# Altium PCB Amber_Main_Board.PcbDoc (part 6 of 6)
Units mm, origin at the board's own origin, x right, y up, seen from the top; angles counter-clockwise.
Board outline 90 x 23 mm, 4 copper layers (Top Layer, Power, Ground, Bottom Layer), stack 1.142 mm thick; 237 components, 104 nets, 614 pads, 347 vias.
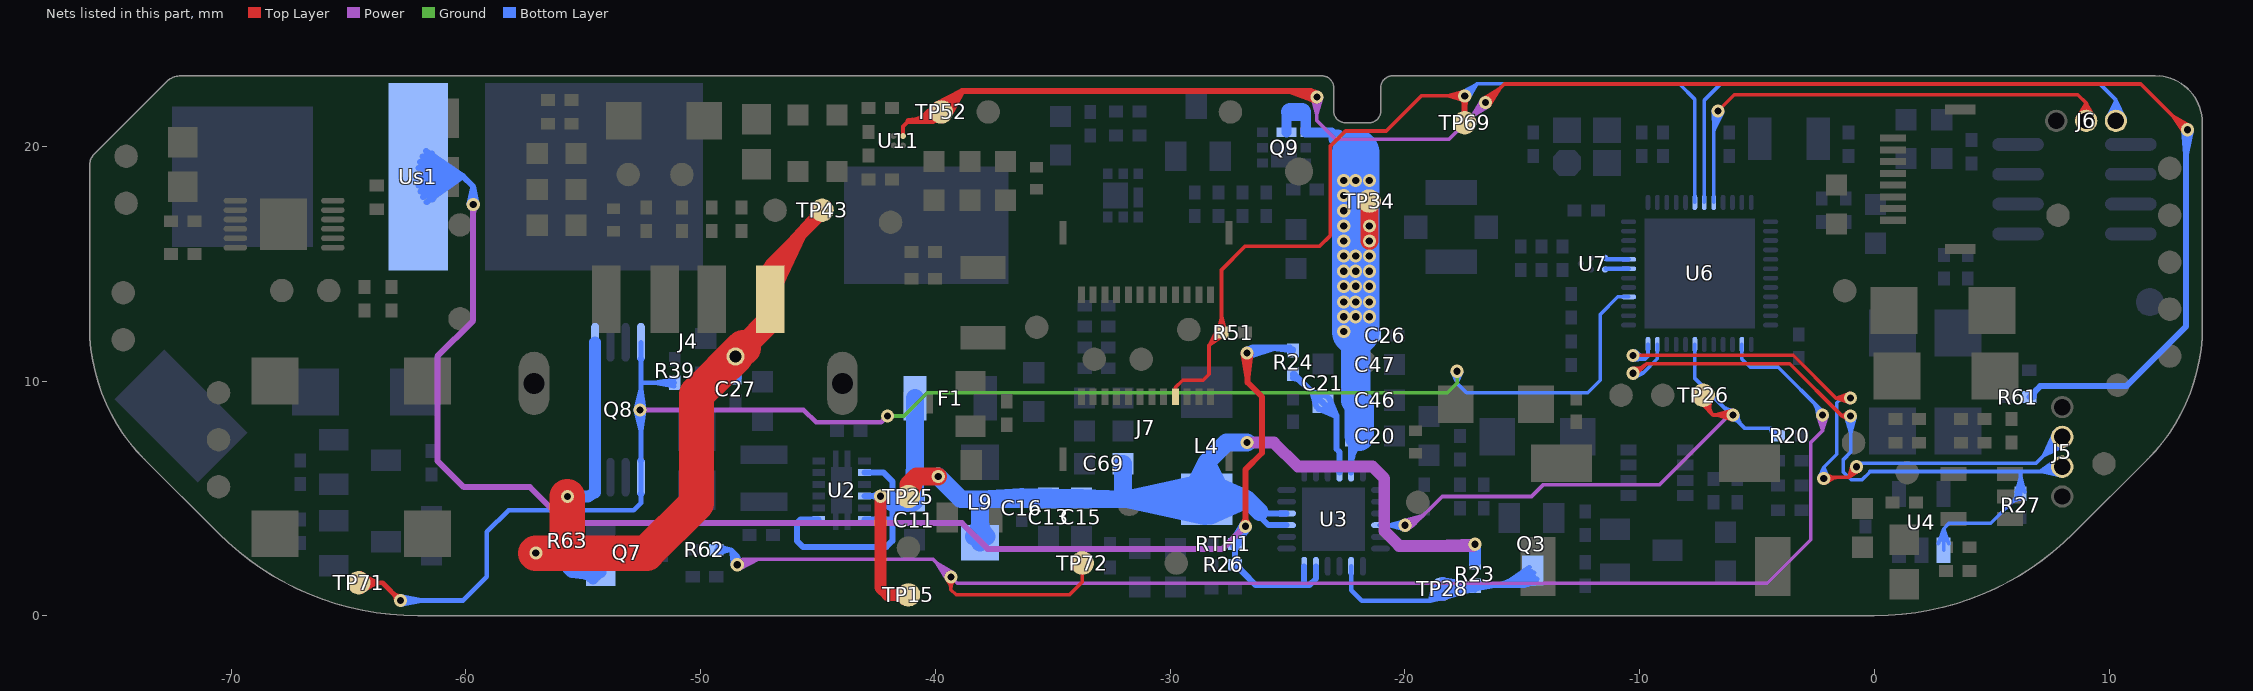
[diagram p8: the nets of this part, all layers, seen from the top]

## Via types
v1: diameter 0.559, hole 0.305, Top Layer to Bottom Layer, tented both sides, 306 vias
v2: diameter 0.66, hole 0.33, Top Layer to Bottom Layer, tented both sides, 16 vias
v3: diameter 0.762, hole 0.508, Top Layer to Bottom Layer, tented both sides, 12 vias
v4: diameter 0.6, hole 0.3, Top Layer to Bottom Layer, tented both sides, 9 vias
v5: diameter 0.5, hole 0.3, Top Layer to Bottom Layer, 3 vias
v6: diameter 0.762, hole 0.559, Top Layer to Bottom Layer, tented both sides, 1 vias

## Nets (pads, with @x,y where several pads share a name; then routed paths per layer and width w, separated by ;. In a path a pad name is that pad's centre, name@x,y a point inside that pad or via, vN(x,y) a via of type N, cw(c..) or ccw(c..) an arc to the next point about the centre after c; other vN are vias at no path point) (continued)
NetR61_1: R61.1 TP52.1 U11.B2 | length 113.2
  Top Layer w0.152: v1@-16.69,22.017 -15.961,22.459 v1@-16.404,21.731 ; v1(-16.564,21.857) -15.77,22.651 11.344,22.651 13.294,20.701 v1(13.335,20.701) ; v1@-16.564,22.06 ccw(c-16.564,22.55) -16.217,22.204 ccw(c-15.87,21.857) v1@-16.361,21.857 ; 12.918,21.077 ccw(c13.335,21.495) v1@13.335,20.904 ; 13.017,20.977 cw(c12.741,20.701) v1@13.132,20.701 ; v1@13.162,20.594 13.04,20.983 ; v1@13.18,20.57 12.714,21.281 ; v1@13.434,20.878 13.04,20.983 ; v1@13.455,20.865 12.714,21.281 ; 12.714,21.281 v1(13.335,20.701) ; 13.04,20.983 v1(13.335,20.701)
  Top Layer w0.178: U11.B2@-41.383,20.438 -41.383,20.847 -41.154,21.076
  Top Layer w0.254: -40.685,21.076 ccw(c-40.685,22.072) TP52.1@-39.851,21.528 ; -40.216,21.076 ccw(c-40.216,21.766) TP52.1@-39.638,21.389 ; TP52.1@-40.093,21.314 cw(c-40.29,21.228) -40.138,21.076 ; TP52.1@-40.063,21.667 cw(c-41.154,22.378) -41.154,21.076 -40.138,21.076 ; TP52.1@-39.973,21.763 -38.862,22.352 ; TP52.1@-39.935,21.788 -40.565,21.217 ; TP52.1@-39.9,21.121 ccw(c-39.986,20.924) -40.138,21.076 ; TP52.1@-39.751,21.836 ccw(c-39.751,22.736) -39.114,22.1 ccw(c-38.478,21.463) TP52.1@-39.378,21.463 ; TP52.1@-39.724,21.091 -40.565,21.217 ; TP52.1@-39.451,21.241 -38.862,22.352 ; -24.73,22.352 cw(c-24.73,21.117) v1@-23.857,21.99 ; -24.117,22.352 cw(c-24.117,21.73) v1@-23.677,22.17 ; v1@-23.901,22.101 ccw(c-24.248,22.107) -24.003,22.352 ; v1@-23.811,21.959 -24.41,22.31 ; v1@-23.794,22.143 -24.003,22.352 ; v1@-23.792,21.952 -24.885,22.352 ; v1@-23.752,22.25 cw(c-23.758,22.597) -24.003,22.352 ; v1@-23.726,22.249 -24.885,22.352 ; v1@-23.719,22.247 -24.41,22.31 ; -40.565,21.217 TP52.1@-39.751,21.463 ; -40.138,21.076 TP52.1@-39.751,21.463 ; TP52.1@-39.751,21.463 -38.862,22.352 ; -38.862,22.352 -24.003,22.352 ; -24.885,22.352 v1(-23.749,22.098) -24.41,22.31
  Power w0.152: v1@-23.95,22.07 -23.749,21.361 v1@-23.548,22.07 ; v1@-23.947,22.05 -23.766,21.734 ; v1@-23.941,22.032 -23.732,21.734 ; v1@-23.893,21.954 cw(c-24.24,21.607) -23.749,21.607 cw(c-23.258,21.607) v1@-23.605,21.954 ; v1@-23.557,22.032 -23.766,21.734 ; v1@-23.551,22.05 -23.732,21.734 ; v1@-16.767,21.857 cw(c-17.258,21.857) -16.911,21.51 cw(c-16.564,21.163) v1@-16.564,21.654 ; v1@-16.724,21.982 -17.167,21.254 ; v1@-16.439,21.697 -17.167,21.254 ; -23.766,21.734 v1(-23.749,22.098) ; v1(-23.749,22.098) -23.732,21.734 ; v1(-23.749,22.098) -23.749,21.082 -22.974,20.307 -18.113,20.307 v1(-16.564,21.857) -17.167,21.254
  Bottom Layer w0.254: R61.1@6.596,9.316 7.059,9.779 ; R61.1@6.646,9.316 7.059,9.779 ; R61.1@6.769,9.316 cw(c7.187,9.316) 6.891,9.611 ; v1@13.183,20.698 13.281,19.655 ; v1@13.184,20.683 13.3,20.346 ; 13.281,20.203 cw(c13.833,20.203) v1@13.443,20.593 ; v1@13.281,20.714 13.281,12.332 10.728,9.779 7.059,9.779 ; v1@13.48,20.654 13.3,20.346 ; v1@13.486,20.682 13.281,19.655 ; 13.281,19.655 v1(13.335,20.701) 13.3,20.346
NetU6_31: U6.31 U7.1 | length 1
  Bottom Layer w0.203: U7.1@-11.442,14.783 U6.31@-10.472,14.783
NetU6_32: U6.32 U7.2 | length 0.9
  Bottom Layer w0.203: U7.2@-11.41,15.183 U6.32@-10.472,15.183
NTC: R24.2 R26.1 RTH1.1 U3.11 U3.12 Us1.2 | length 148.5
  Top Layer w0.254: v1@-26.905,3.918 ccw(c-27.165,4.178) -26.797,4.178 ccw(c-26.429,4.178) v1@-26.689,3.918 ; v1@-26.876,11.174 -26.699,10.147 ; v1@-26.871,11.147 -26.714,10.877 ; v1@-26.832,11.081 cw(c-27.153,10.759) -26.699,10.759 ; v1(-26.797,3.81) -26.797,6.223 -26.089,6.931 -26.089,9.325 -26.699,9.935 -26.699,11.163 v1(-26.724,11.189) ; -26.699,10.882 cw(c-26.417,10.882) v1@-26.616,11.081 ; v1@-26.575,11.156 -26.714,10.877 ; v1@-26.572,11.181 -26.699,10.147 ; v1(-26.724,11.189) -26.714,10.877 ; v1(-26.724,11.189) -26.699,10.147
  Power w0.254: v1@-59.798,17.418 cw(c-60.058,17.158) -59.69,17.158 cw(c-59.322,17.158) v1@-59.582,17.418 ; v1(-59.69,17.526) -59.69,12.573 -61.214,11.049 -61.214,6.604 -60.09,5.48 -57.271,5.48 -55.74,3.95 -38.875,3.95 -37.778,2.853 -27.754,2.853 v1(-26.797,3.81) ; v1@-26.949,3.81 cw(c-27.317,3.81) -27.057,3.55 cw(c-26.797,3.29) v1@-26.797,3.658
  Bottom Layer w0.254: Us1.2@-62.025,19.081 -60.659,18.872 ; Us1.2@-62.015,18.319 -60.669,18.565 ; Us1.2@-61.997,19.08 -60.128,18.726 ; Us1.2@-61.987,18.321 -60.128,18.726 ; Us1.2@-61.962,19.331 -60.659,18.872 ; Us1.2@-61.944,18.071 -60.669,18.565 ; Us1.2@-61.94,19.07 -60.669,18.565 ; Us1.2@-61.933,19.327 -60.128,18.726 ; Us1.2@-61.931,18.332 -60.659,18.872 ; Us1.2@-61.916,18.075 -60.128,18.726 ; Us1.2@-61.851,19.571 -60.659,18.872 ; Us1.2@-61.834,19.567 -60.128,18.726 ; Us1.2@-61.826,17.835 -60.669,18.565 ; Us1.2@-61.822,19.3 -60.669,18.565 ; Us1.2@-61.811,17.838 -60.128,18.726 ; Us1.2@-61.808,18.105 -60.659,18.872 ; Us1.2@-61.701,19.795 -60.128,18.726 ; Us1.2@-61.691,19.791 -60.659,18.872 ; Us1.2@-61.672,17.615 -60.128,18.726 ; Us1.2@-61.66,19.508 -60.669,18.565 ; Us1.2@-61.658,17.619 -60.669,18.565 ; Us1.2@-61.642,17.9 -60.659,18.872 ; Us1.2@-61.452,19.686 -60.669,18.565 ; Us1.2@-61.431,17.726 -60.659,18.872 ; Us1.2@-61.254,19.133 ccw(c-60.56,19.52) -60.56,18.726 ; Us1.2@-61.237,18.298 cw(c-60.541,17.946) -60.541,18.726 ; Us1.2@-61.032,19.257 ccw(c-60.128,19.761) -60.128,18.726 ; Us1.2@-61.01,18.183 cw(c-60.128,17.736) -60.128,18.726 ; v1@-59.842,17.541 -59.69,18.288 ; v1@-59.798,17.634 ccw(c-60.058,17.894) -59.69,17.894 ccw(c-59.322,17.894) v1@-59.582,17.634 ; v1(-59.69,17.526) -59.69,18.288 ; v1@-59.538,17.541 -59.69,18.288 ; R26.1@-27.327,2.259 ccw(c-27.537,2.469) -27.24,2.469 ccw(c-26.943,2.469) R26.1@-27.153,2.259 ; RTH1.1@-27.327,2.974 cw(c-27.537,2.764) -27.24,2.764 cw(c-26.943,2.764) RTH1.1@-27.153,2.974 ; RTH1.1@-27.327,3.148 ccw(c-27.537,3.358) -27.24,3.358 ccw(c-26.943,3.358) RTH1.1@-27.153,3.148 ; RTH1.1@-27.321,3.05 cw(c-26.85,3.089) -27.184,3.423 ; R26.1@-27.24,2.172 RTH1.1@-27.24,3.061 ; R26.1@-27.19,2.172 -26.446,1.386 ; R26.1@-27.067,2.172 ccw(c-26.669,2.172) -26.95,1.89 ; RTH1.1@-27.067,3.071 cw(c-26.136,3.149) v1(-26.797,3.81) ; -26.982,3.547 RTH1.1@-27.19,3.061 ; v1@-26.949,3.81 cw(c-27.317,3.81) -27.057,3.55 cw(c-26.797,3.29) v1@-26.797,3.658 ; v1@-26.944,3.771 cw(c-27.3,3.675) -26.981,3.491 cw(c-26.662,3.307) v1@-26.758,3.663 ; v1@-26.939,3.864 -27.039,3.391 ; v1@-26.917,3.904 -27.24,3.367 ; v1@-26.796,11.261 cw(c-26.387,10.852) -26.387,11.43 ; v1@-26.753,11.338 -26.082,11.389 ; v1@-26.745,11.34 -25.513,11.43 ; v1@-26.703,3.69 -27.24,3.367 ; v1@-26.685,11.041 -25.513,11.43 ; v1@-26.679,3.714 -27.039,3.391 ; v1@-26.662,11.049 -26.082,11.389 ; v1@-26.616,11.081 cw(c-25.774,10.238) -25.774,11.43 ; -25.825,11.43 R24.2@-24.765,11.295 -24.9,11.43 -26.483,11.43 v1(-26.724,11.189) ; -25.267,11.43 cw(c-25.267,10.843) R24.2@-24.852,11.258 ; -25.115,11.41 R24.2@-24.765,11.345 ; U3.12@-24.291,1.834 -24.291,1.349 ; U3.12@-24.291,2.109 -24.291,1.349 ; U3.11@-23.791,1.834 -23.791,1.581 ; U3.11@-23.791,2.109 -23.791,1.581 ; Us1.2@-62.03,18.7 -60.659,18.872 ; Us1.2@-62.03,18.7 -60.669,18.565 ; Us1.2@-62.03,18.7 -60.128,18.726 ; Us1.2@-62.03,18.7 -62.004,18.726 -60.128,18.726 ; -60.128,18.726 -59.69,18.288 ; RTH1.1@-27.24,3.061 -27.24,3.367 ; RTH1.1@-27.24,3.061 -27.24,3.367 ; RTH1.1@-27.24,3.061 -27.24,2.18 -26.375,1.315 -24.257,1.315 ; -27.24,3.367 v1(-26.797,3.81) ; -27.24,3.367 v1(-26.797,3.81) ; RTH1.1@-27.19,3.061 -26.669,3.727 RTH1.1@-27.19,3.061 ; RTH1.1@-27.19,3.061 v1(-26.797,3.81) ; RTH1.1@-27.19,3.061 -26.938,3.868 RTH1.1@-27.19,3.061 ; RTH1.1@-27.19,3.061 v1(-26.797,3.81) ; RTH1.1@-27.19,3.061 v1(-26.797,3.81) ; -27.039,3.391 v1(-26.797,3.81) ; v1(-26.724,11.189) -26.082,11.389 ; v1(-26.724,11.189) -25.513,11.43 ; -24.291,1.349 -24.257,1.315 ; -24.257,1.315 -24.057,1.315 -23.791,1.581
ON/OFF: Q8.4 Q8.5 R39.1 TP71.1 U6.28 | length 105.9
  Top Layer w0.203: TP71.1@-64.552,1.215 -63.857,1.377 ; TP71.1@-64.552,1.604 -63.857,1.443 ; TP71.1@-64.535,1.218 -63.857,1.443 ; TP71.1@-64.535,1.602 -63.857,1.377 ; TP71.1@-64.477,1.022 -63.857,1.377 ; TP71.1@-64.477,1.797 -63.857,1.443 ; TP71.1@-64.441,1.033 -63.857,1.443 ; TP71.1@-64.441,1.787 -63.857,1.377 ; TP71.1@-64.288,1.128 cw(c-63.608,0.448) -63.608,1.41 cw(c-63.608,2.372) TP71.1@-64.288,1.691 ; v1@-62.97,0.648 ccw(c-63.399,0.648) -63.096,0.951 ccw(c-62.792,1.255) v1@-62.792,0.826 ; v1(-62.792,0.648) -63.554,1.41 TP71.1@-64.57,1.41 ; TP71.1@-64.57,1.41 -63.857,1.377 ; TP71.1@-64.57,1.41 -63.857,1.443
  Power w0.203: v1(-52.578,8.763) -45.606,8.763 -45.085,8.242 -42.304,8.242 v1(-42.037,8.509)
  Ground w0.152: v1(-42.037,8.509) -41.337,8.509 -40.346,9.5 -18.186,9.5 -17.78,9.906 v1(-17.78,10.414)
  Bottom Layer w0.152: v1@-17.979,10.373 -17.78,9.906 ; v1@-17.978,10.366 -17.797,10.05 ; v1@-17.972,10.348 -17.763,10.05 ; v1@-17.924,10.27 cw(c-18.271,9.923) -17.78,9.923 cw(c-17.289,9.923) v1@-17.636,10.27 ; v1@-17.588,10.348 -17.797,10.05 ; v1@-17.582,10.366 -17.763,10.05 ; v1@-17.581,10.373 -17.78,9.906 ; U6.28@-10.697,13.583 -10.936,13.583 ; U6.28@-10.472,13.583 -10.936,13.583 ; -17.797,10.05 v1(-17.78,10.414) ; -17.78,9.906 v1(-17.78,10.414) ; -17.78,9.906 v1(-17.78,10.414) ; -17.78,9.906 -17.374,9.5 -12.212,9.5 -11.684,10.028 -11.684,12.835 -10.936,13.583 ; v1(-17.78,10.414) -17.763,10.05
  Bottom Layer w0.203: v1@-62.774,0.471 -61.903,0.648 v1@-62.774,0.825 ; v1@-62.75,0.475 -62.474,0.633 ; v1@-62.75,0.821 -62.474,0.662 ; v1@-62.735,0.479 -62.474,0.662 ; v1@-62.735,0.816 -62.474,0.633 ; v1@-62.666,0.522 cw(c-62.363,0.218) -62.363,0.648 cw(c-62.363,1.077) v1@-62.666,0.773 ; v1@-52.754,8.739 -52.546,7.873 ; v1@-52.754,8.787 -52.546,9.653 ; v1@-52.749,8.714 -52.564,8.396 ; v1@-52.749,8.812 -52.564,9.13 ; v1@-52.704,8.637 cw(c-53.084,8.257) -52.546,8.257 ; v1@-52.704,8.889 ccw(c-53.084,9.269) -52.546,9.269 ; Q8.5@-52.598,5.199 cw(c-52.723,5.074) -52.546,5.074 cw(c-52.369,5.074) Q8.5@-52.494,5.199 ; Q8.5@-52.598,6.603 ccw(c-52.723,6.728) -52.546,6.728 ccw(c-52.369,6.728) Q8.5@-52.494,6.603 ; Q8.4@-52.598,10.949 cw(c-52.723,10.824) -52.546,10.824 cw(c-52.369,10.824) Q8.4@-52.494,10.949 ; Q8.5@-52.546,5.251 -52.546,4.798 ; Q8.5@-52.546,6.551 -52.546,7.335 ; -52.546,8.411 cw(c-52.226,8.411) v1@-52.452,8.637 ; -52.546,9.115 ccw(c-52.226,9.115) v1@-52.452,8.889 ; -52.546,10.216 Q8.4@-52.546,11.001 ; Q8.4@-52.546,11.651 Q8.5@-52.546,5.901 -52.546,4.798 ; -52.538,9.927 R39.1@-51.108,9.927 ; v1@-52.404,8.726 -52.564,8.396 ; v1@-52.404,8.8 -52.564,9.13 ; v1@-52.401,8.752 -52.546,7.873 ; v1@-52.401,8.774 -52.546,9.653 ; R39.1@-51.213,9.822 ccw(c-51.466,9.568) -51.466,9.927 ccw(c-51.466,10.285) R39.1@-51.213,10.032 ; R39.1@-51.156,9.786 -51.374,9.939 ; R39.1@-51.156,10.067 -51.374,9.915 ; R39.1@-51.143,9.782 -51.374,9.915 ; R39.1@-51.143,10.071 -51.374,9.939 ; R39.1@-51.121,9.779 -51.968,9.927 ; R39.1@-51.121,10.075 -51.968,9.927 ; v1(-62.792,0.648) -62.474,0.633 ; v1(-62.792,0.648) -62.474,0.662 ; v1(-62.792,0.648) -60.125,0.648 -59.109,1.664 -59.109,3.569 -58.182,4.496 -52.848,4.496 -52.546,4.798 ; v1(-52.578,8.763) -52.564,9.13 ; v1(-52.578,8.763) -52.564,8.396 ; v1(-52.578,8.763) -52.546,9.653 ; v1(-52.578,8.763) -52.546,7.873 ; -51.968,9.927 R39.1@-51.108,9.927 ; -51.374,9.915 R39.1@-51.108,9.927 ; -51.374,9.939 R39.1@-51.108,9.927
OTG: Q3.3 R23.1 TP28.1 U3.8 | length 137.8
  Bottom Layer w0.203: -22.291,1.099 U3.8@-22.291,1.834 ; U3.8@-22.291,2.109 -22.291,1.082 -21.844,0.635 -18.923,0.635 ; TP28.1@-18.803,1.053 cw(c-19.24,0.952) -18.923,0.635 ; TP28.1@-18.505,0.755 ccw(c-18.606,0.318) -18.923,0.635 ; TP28.1@-18.439,1.337 -17.318,1.376 ; TP28.1@-18.436,1.337 -17.909,1.295 ; TP28.1@-18.427,1.541 -17.318,1.376 ; TP28.1@-18.426,1.338 R23.1@-17.237,1.306 ; TP28.1@-18.417,1.338 -17.859,1.246 ; TP28.1@-18.413,1.338 -17.495,1.23 ; TP28.1@-18.408,0.948 -17.306,1.083 ; TP28.1@-18.406,1.338 R23.1@-17.247,1.189 ; TP28.1@-18.403,0.948 R23.1@-17.031,1.13 ; TP28.1@-18.403,1.541 R23.1@-17.237,1.306 ; TP28.1@-18.399,1.338 R23.1@-17.031,1.13 ; TP28.1@-18.391,0.949 R23.1@-17.247,1.189 ; TP28.1@-18.387,1.336 -17.306,1.083 ; TP28.1@-18.376,0.952 -17.495,1.23 ; TP28.1@-18.377,1.54 -17.909,1.295 ; TP28.1@-18.375,0.952 -17.295,1.278 ; TP28.1@-18.375,0.952 -17.298,1.278 ; TP28.1@-18.373,0.952 R23.1@-17.237,1.306 ; TP28.1@-18.365,0.748 -17.306,1.083 ; TP28.1@-18.366,1.538 -17.495,1.23 ; TP28.1@-18.363,1.538 R23.1@-17.247,1.189 ; TP28.1@-18.361,0.748 R23.1@-17.031,1.13 ; TP28.1@-18.358,0.956 -17.318,1.376 ; TP28.1@-18.354,1.537 R23.1@-17.031,1.13 ; TP28.1@-18.347,0.96 -17.859,1.246 ; TP28.1@-18.345,1.535 -17.859,1.246 ; TP28.1@-18.332,0.753 R23.1@-17.247,1.189 ; TP28.1@-18.325,0.97 -17.909,1.295 ; TP28.1@-18.322,1.53 -17.306,1.083 ; TP28.1@-18.295,0.763 R23.1@-17.237,1.306 ; TP28.1@-18.293,0.764 -17.495,1.23 ; TP28.1@-18.277,1.005 cw(c-17.618,0.346) -17.618,1.278 ; TP28.1@-18.264,0.774 -17.318,1.376 ; TP28.1@-18.209,0.802 -17.859,1.246 ; TP28.1@-18.165,0.833 -17.909,1.295 ; TP28.1@-18.133,0.861 cw(c-17.127,-0.145) R23.1@-17.127,1.278 ; TP28.1@-18.133,1.425 ccw(c-17.779,1.779) -17.779,1.278 ; R23.1@-17.123,1.173 ccw(c-17.376,0.92) -17.376,1.278 ccw(c-17.376,1.636) R23.1@-17.123,1.383 ; R23.1@-17.066,1.138 -17.284,1.29 ; R23.1@-17.066,1.418 -17.284,1.266 ; R23.1@-17.056,1.371 -17.839,1.087 ; R23.1@-17.053,1.134 -17.284,1.266 ; R23.1@-17.053,1.422 -17.284,1.29 ; R23.1@-17.031,1.426 -17.878,1.278 ; R23.1@-17.018,1.228 -17.839,1.087 ; R23.1@-17.006,1.08 -17.839,1.087 ; R23.1@-17.005,1.13 -16.158,1.278 R23.1@-17.005,1.426 ; R23.1@-16.983,1.134 -16.752,1.266 ; R23.1@-16.983,1.422 -16.752,1.29 ; R23.1@-16.97,1.138 -16.752,1.29 ; R23.1@-16.97,1.418 -16.752,1.266 ; R23.1@-16.913,1.173 cw(c-16.66,0.92) -16.66,1.278 cw(c-16.66,1.636) R23.1@-16.913,1.383 ; -16.533,1.278 ccw(c-16.533,3.731) Q3.3@-14.798,1.996 ; -16.042,1.278 ccw(c-16.042,3.24) Q3.3@-14.655,1.853 ; -15.552,1.278 ccw(c-15.552,2.75) Q3.3@-14.511,1.709 ; -15.061,1.278 ccw(c-15.061,2.259) Q3.3@-14.367,1.565 ; Q3.3@-14.901,1.709 cw(c-15.431,1.655) -15.054,1.278 ; Q3.3@-14.809,1.985 -15.171,1.328 ; Q3.3@-14.734,2.048 -15.53,1.347 ; Q3.3@-14.709,2.062 -15.853,1.278 ; Q3.3@-14.694,2.069 -15.527,1.494 ; Q3.3@-14.644,1.862 -15.171,1.328 ; Q3.3@-14.629,1.399 ccw(c-14.733,0.957) -15.054,1.278 ; Q3.3@-14.614,1.882 -15.53,1.347 ; Q3.3@-14.606,1.885 -15.853,1.278 ; Q3.3@-14.596,1.889 -15.527,1.494 ; Q3.3@-14.521,1.39 -15.527,1.494 ; Q3.3@-14.52,1.595 -15.527,1.494 ; Q3.3@-14.504,1.599 -15.853,1.278 ; Q3.3@-14.503,1.829 -15.054,1.278 ; Q3.3@-14.5,1.6 -15.53,1.347 ; Q3.3@-14.476,1.61 -15.171,1.328 ; Q3.3@-14.471,1.398 -15.853,1.278 ; Q3.3@-14.471,1.398 -15.53,1.347 ; Q3.3@-14.425,1.411 -15.171,1.328 ; -18.923,0.635 TP28.1@-18.222,0.794 ; -18.923,0.635 TP28.1@-18.764,1.336 ; -18.923,0.635 TP28.1@-18.297,0.988 ; -18.923,0.635 TP28.1@-18.57,1.261 ; -18.923,0.635 TP28.1@-18.415,1.143 ; -18.923,0.635 TP28.1@-18.222,0.794 ; -18.923,0.635 TP28.1@-18.764,1.336 ; -18.923,0.635 TP28.1@-18.297,0.988 ; -18.923,0.635 TP28.1@-18.57,1.261 ; -18.923,0.635 TP28.1@-18.415,1.143 ; -18.923,0.635 TP28.1@-18.222,0.794 ; -18.923,0.635 TP28.1@-18.764,1.336 ; -18.923,0.635 TP28.1@-18.297,0.988 ; -18.923,0.635 TP28.1@-18.57,1.261 ; -18.923,0.635 TP28.1@-18.415,1.143 ; -18.923,0.635 TP28.1@-18.415,1.143 ; TP28.1@-18.428,1.338 -17.878,1.278 ; TP28.1@-18.428,1.338 -17.878,1.278 ; TP28.1@-18.428,1.338 -17.878,1.278 ; TP28.1@-18.415,1.143 -17.295,1.278 ; TP28.1@-18.415,1.143 R23.1@-17.031,1.13 ; TP28.1@-18.415,1.143 -17.318,1.376 ; TP28.1@-18.415,1.143 -17.298,1.278 ; TP28.1@-18.415,1.143 -17.306,1.083 ; TP28.1@-18.415,1.143 R23.1@-17.237,1.306 ; TP28.1@-18.415,1.143 R23.1@-17.247,1.189 ; TP28.1@-18.415,1.143 -17.859,1.246 ; TP28.1@-18.415,1.143 -17.909,1.295 ; TP28.1@-18.415,1.143 -17.495,1.23 ; TP28.1@-18.415,1.143 -17.878,1.278 ; TP28.1@-18.415,1.143 -17.878,1.278 ; TP28.1@-18.415,1.143 -17.878,1.278 ; TP28.1@-18.415,1.143 -17.839,1.087 ; TP28.1@-18.415,1.143 -17.839,1.087 ; TP28.1@-18.415,1.143 -17.839,1.087 ; TP28.1@-18.415,1.143 -18.28,1.278 R23.1@-17.018,1.278 ; TP28.1@-18.401,0.948 -17.839,1.087 ; TP28.1@-18.401,0.948 -17.839,1.087 ; TP28.1@-18.401,0.948 -17.839,1.087 ; TP28.1@-18.367,1.538 -17.878,1.278 ; TP28.1@-18.367,1.538 -17.878,1.278 ; TP28.1@-18.367,1.538 -17.878,1.278 ; TP28.1@-18.364,1.331 -17.839,1.087 ; TP28.1@-18.364,1.331 -17.839,1.087 ; TP28.1@-18.364,1.331 -17.839,1.087 ; TP28.1@-18.335,0.965 -17.878,1.278 ; TP28.1@-18.335,0.965 -17.878,1.278 ; TP28.1@-18.335,0.965 -17.878,1.278 ; TP28.1@-18.315,0.757 -17.839,1.087 ; TP28.1@-18.315,0.757 -17.839,1.087 ; TP28.1@-18.315,0.757 -17.839,1.087 ; TP28.1@-18.243,1.502 -17.839,1.087 ; TP28.1@-18.243,1.502 -17.839,1.087 ; TP28.1@-18.243,1.502 -17.839,1.087 ; TP28.1@-18.186,0.817 -17.878,1.278 ; TP28.1@-18.186,0.817 -17.878,1.278 ; TP28.1@-18.186,0.817 -17.878,1.278 ; -17.878,1.278 R23.1@-17.031,1.13 ; -17.878,1.278 R23.1@-17.018,1.278 ; -17.298,1.278 -18.392,1.541 -17.295,1.278 ; -17.298,1.278 -18.298,0.762 -17.295,1.278 ; -17.298,1.278 -18.422,1.338 -17.295,1.278 ; -17.284,1.266 R23.1@-17.018,1.278 ; -17.284,1.29 R23.1@-17.018,1.278 ; R23.1@-17.018,1.278 -16.752,1.266 ; R23.1@-17.018,1.278 -16.752,1.29 ; R23.1@-17.018,1.278 -15.054,1.278 ; -15.853,1.278 Q3.3@-14.547,1.745 ; -15.53,1.347 Q3.3@-14.547,1.745 ; -15.527,1.494 Q3.3@-14.547,1.745 ; -15.171,1.328 Q3.3@-14.547,1.745 ; -15.054,1.278 -14.382,1.43 -15.054,1.278 ; -15.054,1.278 -14.457,1.622 -15.054,1.278 ; -15.054,1.278 Q3.3@-14.547,1.745 ; -15.054,1.278 Q3.3@-14.547,1.745 ; -15.054,1.278 -14.847,1.936 -15.054,1.278 ; -15.054,1.278 -14.662,1.845 -15.054,1.278
PLUG_DETECT: R62.1 TP72.1 U6.14 | length 96.6
  Top Layer w0.152: v1@-39.539,1.603 -39.358,1.287 ; v1@-39.485,1.507 cw(c-39.832,1.16) -39.342,1.16 cw(c-38.851,1.16) v1@-39.198,1.507 ; v1@-39.149,1.585 -39.358,1.287 ; TP72.1@-33.74,2.244 -33.74,1.439 -34.29,0.889 -39.116,0.889 -39.342,1.115 v1(-39.342,1.651) -39.358,1.287
  Power w0.152: v1@-48.513,2.244 cw(c-48.104,1.835) -48.104,2.413 ; v1@-48.486,2.37 -47.981,2.381 ; v1@-48.471,2.373 -47.506,2.413 ; v1@-48.465,2.374 -47.751,2.356 ; v1@-48.405,2.136 cw(c-47.736,1.467) -47.736,2.413 ; v1@-48.37,1.981 -47.506,2.413 ; v1@-48.361,1.985 -47.751,2.356 ; v1@-48.322,2.007 -47.981,2.381 ; v1@-48.297,2.028 cw(c-47.368,1.099) -47.368,2.413 ; v1@-39.545,1.651 ccw(c-40.036,1.651) -39.689,1.998 ccw(c-39.342,2.345) v1@-39.342,1.854 ; v1@-39.502,1.525 -39.944,2.254 ; v1@-39.216,1.811 -39.944,2.254 ; v1@-2.414,8.523 -2.213,7.887 ; v1@-2.411,8.506 -2.23,8.19 ; v1@-2.405,8.488 -2.196,8.19 ; v1@-2.357,8.41 cw(c-2.704,8.063) -2.213,8.063 cw(c-1.722,8.063) v1@-2.069,8.41 ; v1@-2.021,8.488 -2.23,8.19 ; v1@-2.016,8.506 -2.196,8.19 ; v1@-2.012,8.523 -2.213,7.887 ; v1(-48.441,2.172) -47.981,2.381 ; v1(-48.441,2.172) -47.751,2.356 ; v1(-48.441,2.172) -47.506,2.413 ; v1(-48.441,2.172) -48.2,2.413 -40.104,2.413 v1(-39.342,1.651) ; -39.944,2.254 v1(-39.342,1.651) ; v1(-39.342,1.651) -39.071,1.38 -4.572,1.38 -2.718,3.234 -2.718,7.382 -2.213,7.887 ; -2.23,8.19 v1(-2.213,8.554) ; -2.213,7.887 v1(-2.213,8.554) ; v1(-2.213,8.554) -2.196,8.19
  Bottom Layer w0.152: U6.14@-5.647,11.333 -5.647,10.941 ; U6.14@-5.647,11.558 -5.647,10.941 ; -2.664,9.152 cw(c-3.262,8.554) v1@-2.416,8.554 ; -2.404,8.892 cw(c-2.742,8.554) v1@-2.264,8.554 ; v1(-2.213,8.554) -2.213,8.701 -4.098,10.586 -5.292,10.586 -5.647,10.941
  Bottom Layer w0.203: R62.1@-49.338,2.807 -48.695,2.807 ; R62.1@-49.269,2.659 -48.695,2.807 ; R62.1@-49.269,2.954 -48.695,2.807 ; R62.1@-49.253,2.662 -49.023,2.795 ; R62.1@-49.253,2.951 -49.023,2.819 ; R62.1@-49.24,2.666 -49.023,2.819 ; R62.1@-49.24,2.947 -49.023,2.795 ; R62.1@-49.183,2.702 cw(c-48.93,2.448) -48.93,2.807 cw(c-48.93,3.165) R62.1@-49.183,2.912 ; v1@-48.618,2.159 -48.553,2.497 ; v1@-48.613,2.128 -48.695,2.807 ; v1@-48.601,2.249 ccw(c-49.04,2.462) -48.695,2.807 ; v1@-48.555,2.308 ccw(c-48.76,2.553) -48.441,2.553 ; -48.493,2.605 cw(c-48.768,2.33) v1@-48.418,2.161 ; v1@-48.327,2.308 cw(c-48.122,2.553) -48.441,2.553 ; v1@-48.294,2.271 -48.553,2.497 ; v1@-48.286,2.259 -48.695,2.807 ; R62.1@-49.288,2.807 -48.695,2.807 ; R62.1@-49.288,2.807 -49.023,2.795 ; R62.1@-49.288,2.807 -49.023,2.819 ; -48.695,2.807 v1(-48.441,2.172) ; -48.695,2.807 -48.441,2.553 ; -48.553,2.497 v1(-48.441,2.172) ; v1(-48.441,2.172) -48.441,2.553 ; v1(-48.441,2.172) -48.441,2.553 ; -48.441,2.553 -48.614,2.213 -48.441,2.553 ; -48.441,2.553 -48.268,2.213 -48.441,2.553
PMID: C20.1 C26.2 C46.1 C47.1 Q9.4 Q9.8 TP34.1 U3.23 | length 22.7
  Top Layer w0.762: v1(-21.517,15.966) v1(-21.517,16.61) TP34.1@-21.517,17.666
  Bottom Layer w0.254: U3.23@-22.291,6.109 -22.291,7.461 C20.1@-22.098,7.654 ; U3.23@-22.291,6.408 cw(c-20.852,6.408) C20.1@-21.87,7.425 ; -22.291,7.021 cw(c-21.465,7.021) C20.1@-22.049,7.605
  Bottom Layer w0.432: Q9.8@-25.05,20.589 -25.05,21.305 -24.892,21.463 ; -24.384,21.463 -24.223,21.302 Q9.4@-24.223,20.589 -23.139,20.589 -22.88,20.33 ; -22.495,19.711 -22.098,19.711
  Bottom Layer w0.762: -24.892,21.463 -24.384,21.463 ; -22.88,20.33 -22.495,19.945 -22.495,19.711
  Bottom Layer w1.27: C46.1@-22.098,9.178 C47.1@-22.098,10.702 -22.098,11.43 ; C20.1@-21.949,7.654 C46.1@-21.949,9.029 ; -22.355,12.353 cw(c-22.974,11.734) -22.098,11.734 ccw(c-22.974,11.734) -22.355,12.353
  Bottom Layer w2.032: -22.098,12.102 v1(-22.098,12.737) v1(-22.098,13.372) v1(-22.098,14.034) v1(-22.098,14.678) v1(-22.098,15.322) -22.098,16.61 v1(-22.098,18.542) -22.098,19.711
  other v1: -22.606,12.102 -22.606,12.737 -21.517,12.737 -22.606,13.372 -21.517,13.372 -22.606,14.034 -21.517,14.034 -22.606,14.678 -21.517,14.678 -22.606,15.322 -21.517,15.322 -22.606,15.966 -22.606,16.61 -22.606,17.254 -22.606,17.898 -22.606,18.542 -21.517,18.542
REGN: C21.1 R24.1 U3.22 | length 13.5
  Bottom Layer w0.254: R24.1@-24.765,10.122 cw(c-24.765,9.57) -24.375,9.96 ; R24.1@-24.765,10.295 -24.71,10.295 C21.1@-23.495,9.08 ; -24.489,10.048 -24.765,10.245 -23.953,9.538 ; C21.1@-23.818,9.08 ccw(c-24.598,9.08) -24.046,9.632 ccw(c-23.495,10.183) C21.1@-23.495,9.403 ; C21.1@-23.773,8.916 -23.953,9.538 ; C21.1@-23.674,8.812 -22.914,8.5 ; C21.1@-23.495,8.758 cw(c-23.495,7.978) -22.944,8.529 cw(c-22.392,9.08) C21.1@-23.172,9.08 ; C21.1@-23.331,9.359 -23.953,9.538 ; C21.1@-23.226,9.26 -22.914,8.5 ; U3.22@-22.791,6.109 -22.791,6.98 ; U3.22@-22.791,6.384 -22.791,6.98 ; -23.953,9.538 C21.1@-23.495,9.08 ; C21.1@-23.495,9.08 -22.914,8.5 ; -22.914,8.5 -22.914,7.103 -22.791,6.98
STAT_INT: R20.2 TP26.1 U3.4 U6.19 | length 55.1
  Top Layer w0.152: TP26.1@-7.293,9.398 -7.293,8.972 -6.874,8.554 ; TP26.1@-7.193,9.333 ccw(c-6.85,9.109) -7.14,8.819 ; TP26.1@-7.066,9.25 ccw(c-6.69,9.004) -7.007,8.687 ; TP26.1@-6.938,9.166 ccw(c-6.529,8.899) -6.874,8.554 ; v1@-6.167,8.41 ccw(c-6.514,8.063) -6.514,8.554 ccw(c-6.514,9.044) v1@-6.167,8.697 ; v1@-6.089,8.361 -6.387,8.57 ; v1@-6.089,8.746 -6.387,8.537 ; v1@-6.071,8.356 -6.387,8.537 ; v1@-6.071,8.751 -6.387,8.57 ; v1@-6.051,8.352 -6.76,8.554 v1@-6.051,8.755 ; -6.874,8.554 v1(-6.023,8.554) ; -6.387,8.537 v1(-6.023,8.554) ; -6.387,8.57 v1(-6.023,8.554)
  Power w0.152: v1@-20.07,4.043 -19.206,4.289 ; v1@-20.07,4.043 -19.322,4.238 ; v1@-20.025,4.055 -19.506,4.036 ; v1@-19.993,3.753 ccw(c-19.993,4.36) -19.564,3.931 ; v1@-19.993,3.906 ccw(c-19.993,4.88) -19.304,4.191 ; v1@-19.993,4.058 ccw(c-19.993,5.4) -19.044,4.451 ; v1@-19.938,3.659 -19.69,3.834 ; v1@-19.912,4.041 -19.69,3.834 ; v1@-19.886,3.682 -19.506,4.036 ; v1@-19.875,3.689 -19.206,4.289 ; v1@-19.87,3.693 -19.322,4.238 ; v1@-19.817,3.753 cw(c-19.64,3.65) -19.64,3.855 ; v1@-19.817,3.957 ccw(c-19.64,4.059) -19.64,3.855 ; v1(-6.023,8.554) -6.178,8.554 -9.144,5.588 -14.097,5.588 -14.605,5.08 -18.415,5.08 -19.64,3.855 ; v1(-19.993,3.855) -19.69,3.834 ; v1(-19.993,3.855) -19.64,3.855 ; v1(-19.993,3.855) -19.506,4.036 ; v1(-19.993,3.855) -19.322,4.238 ; v1(-19.993,3.855) -19.206,4.289 ; v1(-19.993,3.855) -19.64,3.855 ; -19.64,3.855 -19.935,4.049 -19.64,3.855 ; -19.64,3.855 -19.935,3.66 -19.64,3.855
  Bottom Layer w0.152: U3.4@-21.114,3.859 v1@-19.997,3.859 ; U3.4@-20.766,3.859 v1@-20.184,3.859 ; -20.493,3.859 cw(c-20.493,3.355) v1@-20.137,3.711 ; -20.474,3.859 ccw(c-20.474,4.336) v1@-20.137,3.998 ; v1@-20.062,3.663 -20.351,3.875 ; v1@-20.056,4.048 -20.363,3.842 ; v1@-20.042,3.657 -20.363,3.842 ; v1@-20.04,4.053 -20.351,3.875 ; -7.647,10.776 U6.19@-7.647,11.333 ; U6.19@-7.647,11.558 -7.647,10.107 -5.535,7.995 -4.44,7.995 ; -6.49,8.95 ccw(c-6.023,9.418) v1@-6.023,8.757 ; -6.32,8.78 cw(c-6.547,8.554) v1@-6.226,8.554 ; v1@-6.023,8.351 cw(c-6.023,8.03) -5.796,8.257 ; v1@-6.023,8.525 v1(-6.023,8.554) ; v1@-5.82,8.554 ccw(c-5.159,8.554) -5.626,8.087 ; -4.371,7.926 ccw(c-4.16,8.137) R20.2@-4.16,7.839 ; R20.2@-4.333,7.685 ccw(c-4.706,7.729) -4.44,7.995 ; R20.2@-4.312,7.581 -4.44,7.995 ; R20.2@-4.16,7.665 -4.44,7.995 ; R20.2@-4.11,7.665 -4.44,7.995 ; R20.2@-4.053,7.801 -4.44,7.995 ; U3.4@-20.73,3.859 -20.022,3.654 U3.4@-20.73,3.859 ; U3.4@-20.73,3.859 -20.02,4.056 U3.4@-20.73,3.859 ; U3.4@-20.73,3.859 v1(-19.993,3.855) ; U3.4@-20.73,3.859 v1(-19.993,3.855) ; -20.363,3.842 v1(-19.993,3.855) ; -20.351,3.875 v1(-19.993,3.855)
SWCLK: J5.3 U6.24 | length 67.4
  Top Layer w0.152: v1(-10.287,11.094) -3.46,11.094 -1.637,9.271 ; v1@-2.13,6.043 -1.873,5.904 ; v1@-2.125,6.042 -1.718,5.87 ; v1@-2.1,5.648 -1.718,5.87 ; v1@-2.05,5.671 -1.873,5.904 ; v1@-2.015,5.698 cw(c-1.546,5.229) -1.546,5.893 ; v1@-2.015,5.986 ccw(c-1.791,6.21) -1.791,5.893 ; v1@-1.16,9.127 ccw(c-1.507,8.78) -1.507,9.271 ccw(c-1.507,9.762) v1@-1.16,9.415 ; v1@-1.082,9.079 -1.38,9.288 ; v1@-1.082,9.463 -1.38,9.254 ; v1@-1.064,9.073 -1.38,9.254 ; v1@-1.064,9.469 -1.38,9.288 ; v1@-1.049,9.071 -1.637,9.271 ; v1@-1.049,9.471 -1.637,9.271 ; v1@-0.962,6.313 cw(c-1.426,6.227) -1.092,5.893 ; v1@-0.951,6.424 -0.981,6.069 ; v1@-0.945,6.437 -1.092,5.893 ; -0.892,6.093 cw(c-0.762,5.963) v1@-0.762,6.147 ; -0.887,6.098 ccw(c-1.081,6.291) v1@-0.812,6.341 ; v1@-0.644,6.185 -0.981,6.069 ; v1@-0.621,6.203 -1.092,5.893 ; v1(-2.159,5.842) -1.718,5.87 ; v1(-2.159,5.842) -1.873,5.904 ; v1(-2.159,5.842) -2.108,5.893 -1.092,5.893 ; -1.637,9.271 v1(-1.016,9.271) ; -1.637,9.271 v1(-1.016,9.271) ; -1.38,9.254 v1(-1.016,9.271) ; -1.38,9.288 v1(-1.016,9.271) ; -1.092,5.893 v1(-0.762,6.35) ; -1.092,5.893 -0.762,6.223 v1(-0.762,6.35) ; -0.981,6.069 v1(-0.762,6.35)
  Bottom Layer w0.152: v1@-10.309,10.892 -9.768,10.935 ; v1@-10.27,10.891 -9.992,11.016 ; v1@-10.239,11.111 ccw(c-9.986,11.204) -9.986,10.935 ; v1@-10.192,11.273 -9.768,10.935 ; v1@-10.173,11.262 -9.992,11.016 ; v1@-10.096,11.164 ccw(c-9.768,11.284) -9.768,10.935 ; U6.24@-9.647,11.333 -9.647,11.056 ; U6.24@-9.647,11.558 -9.647,11.056 ; v1@-2.358,5.885 -2.159,6.322 ; v1@-2.356,5.891 -2.177,6.194 ; v1@-2.35,5.91 -2.141,6.194 ; v1@-2.3,5.988 ccw(c-2.624,6.322) -2.159,6.322 ; v1@-2.018,5.988 cw(c-1.694,6.322) -2.159,6.322 ; v1@-1.968,5.91 -2.177,6.194 ; v1@-1.962,5.891 -2.141,6.194 ; v1@-1.96,5.885 -2.159,6.322 ; v1@-1.185,9.158 ccw(c-1.397,9.015) -1.397,9.271 ; v1@-1.185,9.384 cw(c-1.397,9.527) -1.397,9.271 ; v1@-1.171,9.144 v1@-1.016,9.144 ; v1@-1.07,9.075 -1.397,9.271 ; v1@-1.07,9.467 -1.397,9.271 ; v1(-0.762,6.35) -0.61,6.502 6.883,6.502 J5.3@8.001,7.62 ; J5.3@7.602,7.62 cw(c6.639,7.62) 7.32,6.939 cw(c8.001,6.258) J5.3@8.001,7.221 ; J5.3@7.643,7.796 7.52,7.092 ; J5.3@7.661,7.828 7.473,7.139 ; J5.3@7.674,7.848 7.203,6.822 ; J5.3@7.755,7.62 cw(c7.16,7.62) 7.58,7.199 cw(c8.001,6.779) J5.3@8.001,7.374 ; J5.3@7.793,7.752 7.52,7.092 ; J5.3@7.806,7.771 7.473,7.139 ; J5.3@7.809,7.774 7.203,6.822 ; J5.3@7.928,7.679 7.52,7.092 ; J5.3@7.932,7.684 7.203,6.822 ; J5.3@7.933,7.685 7.473,7.139 ; J5.3@8.001,7.592 J5.3@8.001,7.62 ; J5.3@8.06,7.547 7.473,7.139 ; J5.3@8.065,7.551 7.203,6.822 ; J5.3@8.066,7.552 7.52,7.092 ; J5.3@8.133,7.412 7.473,7.139 ; J5.3@8.152,7.425 7.52,7.092 ; J5.3@8.155,7.428 7.203,6.822 ; J5.3@8.177,7.262 7.473,7.139 ; J5.3@8.209,7.28 7.52,7.092 ; J5.3@8.229,7.293 7.203,6.822 ; v1(-10.287,11.094) -9.768,10.935 ; v1(-10.287,11.094) -9.992,11.016 ; v1(-10.287,11.094) -10.128,10.935 -9.768,10.935 ; -9.768,10.935 -9.647,11.056 ; -2.177,6.194 v1(-2.159,5.842) ; v1(-2.159,5.842) -2.141,6.194 ; v1(-2.159,5.842) -2.159,6.322 ; -2.159,6.322 -1.6,6.881 -1.6,9.068 -1.397,9.271 ; -1.397,9.271 v1(-1.016,9.271) -1.397,9.271 ; 7.203,6.822 J5.3@8.001,7.62 ; 7.473,7.139 J5.3@8.001,7.62 ; 7.52,7.092 J5.3@8.001,7.62
SWDIO: J5.2 R27.2 U4.1 U6.23 | length 60
  Top Layer w0.152: v1(-10.287,10.332) -10.112,10.332 -9.706,10.738 ; v1@-10.282,10.382 ccw(c-10.243,10.815) -9.936,10.508 ; v1@-10.269,10.534 ccw(c-10.205,11.237) -9.706,10.738 ; v1@-1.189,8.403 ccw(c-1.378,8.288) -1.378,8.509 ; v1@-1.189,8.615 cw(c-1.378,8.73) -1.378,8.509 ; v1@-1.073,8.314 -1.378,8.509 ; v1@-1.073,8.704 -1.378,8.509 ; v1(-1.016,8.509) -1.378,8.509 ; J5.2@8.009,6.274 J5.2@8.009,6.395 ; -9.706,10.738 -3.607,10.738 -1.378,8.509
  Bottom Layer w0.152: v1@-10.239,10.134 -9.858,10.332 ; v1@-10.239,10.529 -9.858,10.332 ; v1@-10.234,10.136 -9.982,10.309 ; v1@-10.234,10.528 -9.982,10.354 ; v1@-10.205,10.146 -9.982,10.354 ; v1@-10.205,10.518 -9.982,10.309 ; v1@-10.13,10.203 cw(c-9.858,9.98) -9.858,10.332 ; v1@-10.13,10.46 ccw(c-9.858,10.683) -9.858,10.332 ; U6.23@-9.247,11.333 -9.247,10.943 ; U6.23@-9.247,11.558 -9.247,10.943 ; v1@-1.217,8.481 -1.016,7.772 ; v1@-1.214,8.461 -1.033,8.145 ; v1@-1.208,8.443 -0.999,8.145 ; v1@-1.16,8.365 cw(c-1.507,8.018) -1.016,8.018 cw(c-0.525,8.018) v1@-0.872,8.365 ; v1@-0.824,8.443 -1.033,8.145 ; v1@-0.818,8.461 -0.999,8.145 ; v1@-0.815,8.481 -1.016,7.772 ; U4.1@2.726,3.075 2.947,3.709 ; U4.1@2.729,3.09 2.928,3.438 ; U4.1@2.735,3.11 2.965,3.438 ; U4.1@2.788,3.196 ccw(c2.406,3.578) 2.947,3.578 ccw(c3.487,3.578) U4.1@3.105,3.196 ; U4.1@2.947,2.788 2.947,3.709 ; U4.1@3.158,3.11 2.928,3.438 ; U4.1@3.164,3.09 2.965,3.438 ; U4.1@3.167,3.075 2.947,3.709 ; 5.841,4.817 cw(c6.223,4.435) R27.2@6.223,4.975 ; 5.962,4.938 ccw(c5.75,5.149) R27.2@6.049,5.149 ; R27.2@6.051,5.27 6.223,5.956 ; R27.2@6.054,5.29 6.209,5.56 ; R27.2@6.059,5.305 6.237,5.56 ; R27.2@6.079,5.246 5.953,4.903 ; R27.2@6.1,5.372 ccw(c5.803,5.669) 6.223,5.669 ccw(c6.643,5.669) R27.2@6.346,5.372 ; R27.2@6.223,5.149 5.953,4.903 ; R27.2@6.306,4.996 5.953,4.903 ; R27.2@6.387,5.305 6.209,5.56 ; R27.2@6.392,5.29 6.237,5.56 ; R27.2@6.395,5.27 6.223,5.956 ; J5.2@7.842,6.716 7.031,6.147 ; J5.2@7.921,6.583 7.031,6.147 ; J5.2@7.977,6.441 7.031,6.147 ; J5.2@8.003,5.951 7.031,6.147 ; J5.2@8.016,6.257 7.031,6.147 ; J5.2@8.021,6.104 7.031,6.147 ; v1(-10.287,10.332) -9.982,10.309 ; v1(-10.287,10.332) -9.982,10.354 ; v1(-10.287,10.332) -9.858,10.332 ; -9.858,10.332 -9.247,10.943 ; -1.033,8.145 v1(-1.016,8.509) ; -1.016,7.772 v1(-1.016,8.509) ; v1(-1.016,8.509) -0.999,8.145 ; v1(-1.016,8.509) -1.016,6.962 -1.321,6.657 -1.321,6.119 -0.993,5.791 -0.531,5.791 -0.203,6.119 -0.203,6.147 6.223,6.147 ; 2.928,3.438 U4.1@2.947,3.038 ; U4.1@2.947,3.038 2.947,3.709 ; U4.1@2.947,3.038 2.965,3.438 ; 2.947,3.709 3.175,3.937 4.961,3.937 R27.2@6.223,5.199 6.223,6.147 ; 6.209,5.56 R27.2@6.223,5.249 ; R27.2@6.223,5.249 6.237,5.56 ; R27.2@6.223,5.249 6.223,5.956 ; 6.223,6.147 7.798,6.147 J5.2@8.001,6.35 7.031,6.147
SWITCH_KEY: J7.9 R51.2 TP69.1 U6.42 | length 55.3
  Top Layer w0.152: J7.9@-29.832,9.577 ccw(c-29.958,9.703) -29.78,9.703 ccw(c-29.602,9.703) J7.9@-29.728,9.577 ; J7.9@-29.78,9.325 -29.78,9.72 ; -28.187,11.683 ccw(c-28.569,12.065) R51.2@-28.029,12.065 ; -28.066,11.804 cw(c-27.855,11.592) R51.2@-27.855,11.891 ; R51.2@-28.008,12.148 -28.101,11.795 ; R51.2@-27.997,12.166 -28.346,11.524 ; R51.2@-27.978,12.084 -27.813,12.772 ; R51.2@-27.974,12.103 -27.826,12.364 ; R51.2@-27.971,12.115 -27.798,12.388 ; R51.2@-27.928,12.188 ccw(c-28.205,12.465) -27.813,12.465 ; -27.813,12.504 ccw(c-27.366,12.504) R51.2@-27.682,12.188 ; R51.2@-27.758,11.921 -28.101,11.795 ; R51.2@-27.741,11.934 -28.346,11.524 ; R51.2@-27.643,12.127 -27.826,12.364 ; R51.2@-27.637,12.108 -27.798,12.388 ; R51.2@-27.633,12.088 -27.813,12.772 ; v1@-17.597,21.999 ccw(c-17.944,21.652) -17.944,22.143 ccw(c-17.944,22.633) v1@-17.597,22.286 ; v1@-17.519,21.95 -17.817,22.159 ; v1@-17.519,22.335 -17.817,22.126 ; v1@-17.501,21.945 -17.817,22.126 ; v1@-17.501,22.34 -17.817,22.159 ; v1@-17.481,21.941 -18.19,22.143 v1@-17.481,22.344 ; -29.78,9.72 -29.78,9.525 -29.78,9.72 ; -29.78,9.72 -29.467,10.033 -28.6,10.033 -28.346,10.287 -28.346,11.524 ; -28.346,11.524 -27.855,12.065 -28.101,11.795 ; -28.346,11.524 R51.2@-27.813,12.057 ; -27.826,12.364 R51.2@-27.805,12.065 ; R51.2@-27.813,12.057 R51.2@-27.805,12.065 ; R51.2@-27.813,12.057 -27.813,14.732 -26.797,15.748 -23.622,15.748 -23.19,16.18 -23.19,19.99 -22.53,20.65 -20.797,20.65 -19.304,22.143 v1(-17.453,22.143) ; -27.813,12.772 R51.2@-27.805,12.065 ; R51.2@-27.805,12.065 -27.798,12.388 ; -17.817,22.126 v1(-17.453,22.143) ; -17.817,22.159 v1(-17.453,22.143)
  Top Layer w0.254: v1@-17.561,22.035 cw(c-17.821,21.775) -17.453,21.775 cw(c-17.085,21.775) v1@-17.345,22.035 ; TP69.1@-17.453,21 v1(-17.453,22.143)
  Bottom Layer w0.152: v1@-17.575,22.305 -16.939,22.657 ; v1(-17.453,22.143) -16.939,22.657 ; v1@-17.453,22.346 ccw(c-17.453,22.836) -17.106,22.49 ccw(c-16.759,22.143) v1@-17.25,22.143 ; v1@-17.291,22.021 -16.939,22.657 ; U6.42@-7.66,17.621 U6.42@-7.647,17.608 -7.647,21.989 -8.315,22.657 -16.939,22.657 ; U6.42@-7.647,17.833 -7.647,18.39
SYS: C13.1 C15.1 C16.1 C69.1 L4.2 L9.1 R23.2 TP25.1 U3.15 U3.16 | length 117.2
  Top Layer w0.762: TP25.1@-41.033,5.109 cw(c-40.202,5.322) -40.808,5.928 ; v1(-39.878,5.928) -40.808,5.928 ; TP25.1@-41.148,5.08 -40.808,5.928 ; TP25.1@-41.148,5.08 -41.148,5.588 ; TP25.1@-41.148,5.08 -41.148,5.588 ; -41.148,5.588 -40.808,5.928
  Power w0.508: v1(-26.724,7.379) -25.581,7.379 -24.565,6.363 -21.39,6.363 -20.882,5.855 -20.882,3.615 -20.247,2.98 -17.086,2.98 v1(-17.018,3.048) -18.83,2.98
  Bottom Layer w0.254: -26.184,4.419 -26.184,4.232 -25.812,3.859 ; U3.15@-25.316,3.859 -25.812,3.859 ; U3.16@-25.316,4.359 -26.125,4.359 U3.16@-25.041,4.359 ; U3.15@-25.041,3.859 -25.812,3.859
  Bottom Layer w0.508: v1(-17.018,3.048) -17.018,2.328 v1(-17.018,3.048) ; v1(-17.018,3.048) R23.2@-17.018,2.278 v1(-17.018,3.048)
  Bottom Layer w0.762: v1(-39.878,5.928) -38.914,4.964 -38.1,4.964 ; L9.1@-38.368,3.384 ccw(c-39.015,4.031) -38.1,4.031 ccw(c-37.185,4.031) L9.1@-37.832,3.384 ; L9.1@-38.1,3.116 -38.1,4.964 ; -37.917,4.964 C13.1@-35.179,5.016 ; -32.441,4.964 C13.1@-35.179,5.016 ; C69.1@-32.004,6.477 -32.004,4.964 ; L4.2@-29.148,5.13 -28.448,6.526 ; L4.2@-29.143,5.148 -28.524,6.081 ; L4.2@-29.112,5.241 -28.372,6.081 ; L4.2@-28.956,4.456 ccw(c-30.184,3.228) -30.184,4.964 ccw(c-30.184,6.7) L4.2@-28.956,5.472 ; L4.2@-28.915,5.51 ccw(c-29.784,6.526) -28.448,6.526 ; L4.2@-28.68,4.284 -29.735,5.023 ; L4.2@-28.68,5.644 -29.735,4.905 ; L4.2@-28.617,4.265 -29.735,4.905 ; L4.2@-28.617,5.663 -29.735,5.023 ; L4.2@-28.524,4.249 -31.834,4.964 L4.2@-28.524,5.679 ; L4.2@-28.298,4.261 -26.73,4.964 ; L4.2@-28.298,5.667 -26.73,4.964 ; L4.2@-28.278,4.265 -27.18,4.903 ; L4.2@-28.278,5.663 -27.18,5.025 ; L4.2@-28.212,4.285 -27.18,5.025 ; L4.2@-28.212,5.643 -27.18,4.903 ; L4.2@-27.981,5.51 cw(c-27.112,6.526) -28.448,6.526 ; L4.2@-27.936,4.459 cw(c-26.73,3.27) -26.73,4.964 ; L4.2@-27.936,5.469 ccw(c-26.73,6.658) -26.73,4.964 ; L4.2@-27.784,5.241 -28.524,6.081 ; L4.2@-27.753,5.148 -28.372,6.081 ; L4.2@-27.748,5.13 -28.448,6.526 ; -26.184,4.419 -26.73,4.964 ; -38.1,4.964 C16.1@-36.322,5.072 ; -38.1,4.964 -32.004,4.964 ; C16.1@-36.322,5.072 -33.766,4.964 C13.1@-35.179,5.016 ; C16.1@-36.322,5.072 C15.1@-33.782,5.016 ; C16.1@-36.322,5.072 C13.1@-35.179,5.016 ; C16.1@-36.322,5.072 C13.1@-35.179,5.016 ; C13.1@-35.179,5.016 -36.52,4.964 C15.1@-33.782,5.016 ; C13.1@-35.179,5.016 C15.1@-33.782,5.016 ; C13.1@-35.179,5.016 C15.1@-33.782,5.016 ; C15.1@-33.782,5.016 -32.004,4.964 ; -32.004,4.964 L4.2@-28.448,4.964 ; -29.735,4.905 L4.2@-28.448,4.964 ; -29.735,5.023 L4.2@-28.448,4.964 ; -28.524,6.081 L4.2@-28.448,4.964 ; L4.2@-28.448,4.964 -28.372,6.081 ; L4.2@-28.448,4.964 -27.18,4.903 ; L4.2@-28.448,4.964 -27.18,5.025 ; L4.2@-28.448,4.964 -28.448,6.526 ; L4.2@-28.448,4.964 -26.73,4.964 ; -28.448,6.526 -27.595,7.379 ; -27.595,7.379 v1(-26.724,7.379) -27.595,7.379
SYS_VCC: C11.1 F1.1 TP15.1 U2.1 U2.8 U2.10 U2.12 | length 37.2
  Top Layer w0.508: v1(-42.345,5.093) -42.345,1.197 -42.037,0.889 TP15.1@-41.148,0.889 TP15.1@-41.021,0.889 ; TP15.1@-41.322,0.715 ccw(c-41.742,0.295) -41.742,0.889 ccw(c-41.742,1.483) TP15.1@-41.322,1.063
  Bottom Layer w0.254: U2.1@-45.096,4.097 -45.754,4.097 ; U2.1@-44.971,4.097 -45.754,4.097 ; U2.12@-43.021,4.097 -41.857,4.097 ; U2.10@-43.021,5.097 -41.841,5.097 ; U2.8@-43.021,6.097 -42.206,6.097 ; U2.12@-42.896,4.097 -41.984,4.097 ; U2.10@-42.896,5.097 -41.984,5.097 ; U2.8@-42.896,6.097 -42.206,6.097 ; -42.723,5.097 cw(c-42.723,4.715) v1@-42.453,4.985 ; -42.703,5.097 ccw(c-42.703,5.451) v1@-42.453,5.2 ; v1@-42.323,5.244 -41.841,5.097 ; v1@-42.321,4.942 -41.841,5.097 ; v1@-42.315,5.242 -41.984,5.097 ; v1@-42.311,4.944 -41.984,5.097 ; v1@-42.237,4.985 cw(c-41.967,4.715) -41.967,5.097 ; v1@-42.237,5.2 ccw(c-41.987,5.451) -41.987,5.097 ; -45.754,4.097 -45.901,3.95 -45.901,3.188 -45.647,2.934 -42.091,2.934 -41.837,3.188 -41.837,4.826 -41.837,5.728 -42.206,6.097 ; -41.984,5.097 v1(-42.345,5.093) -41.841,5.097
  Bottom Layer w0.762: C11.1@-40.957,4.826 -41.837,4.826 C11.1@-40.894,4.889 -40.87,7.626 ; C11.1@-40.87,4.913 F1.1@-40.87,9.271 ; -40.87,6.035 F1.1@-40.87,8.821
UART_RX: J6.2 U6.44 | length 42.2
  Top Layer w0.152: v1(-6.658,21.508) -5.972,22.194 8.667,22.194 9.017,21.844 ; J6.2@8.632,21.186 9.017,21.844 ; J6.2@8.634,21.194 8.966,21.618 ; J6.2@8.662,21.264 9.068,21.618 ; J6.2@8.773,21.116 8.966,21.618 ; J6.2@8.774,21.122 9.017,21.844 ; J6.2@8.783,21.161 9.068,21.618 ; J6.2@8.79,21.41 ccw(c8.488,21.844) 9.017,21.844 ; J6.2@8.923,21.081 8.966,21.618 ; J6.2@8.923,21.088 9.017,21.844 ; J6.2@8.925,21.099 9.068,21.618 ; J6.2@9.109,21.099 8.966,21.618 ; J6.2@9.111,21.081 9.068,21.618 ; J6.2@9.111,21.088 9.017,21.844 ; J6.2@9.244,21.41 cw(c9.546,21.844) 9.017,21.844 ; J6.2@9.251,21.161 8.966,21.618 ; J6.2@9.26,21.122 9.017,21.844 ; J6.2@9.261,21.116 9.068,21.618 ; J6.2@9.372,21.264 8.966,21.618 ; J6.2@9.4,21.194 9.068,21.618 ; J6.2@9.402,21.186 9.017,21.844 ; 8.966,21.618 J6.2@9.017,21.082 ; J6.2@9.017,21.082 9.068,21.618 ; J6.2@9.017,21.082 9.017,21.844
  Bottom Layer w0.152: v1@-6.861,21.523 -6.808,20.855 ; v1@-6.86,21.529 -6.847,20.664 ; v1@-6.859,21.539 -6.821,21.128 ; U6.44@-6.847,17.608 -6.847,21.319 v1(-6.658,21.508) ; U6.44@-6.847,17.833 -6.847,18.39 ; -6.847,20.561 cw(c-5.711,20.561) v1@-6.514,21.364 ; -6.847,20.929 cw(c-6.079,20.929) v1@-6.622,21.472 ; -6.847,21.297 cw(c-6.447,21.297) v1@-6.73,21.58 ; v1@-6.497,21.384 -6.821,21.128 ; v1@-6.469,21.433 -6.808,20.855 ; v1@-6.466,21.44 -6.847,20.664 ; -6.847,20.664 v1(-6.658,21.508) ; -6.821,21.128 v1(-6.658,21.508) ; -6.808,20.855 v1(-6.658,21.508)
UART_TX: J6.1 U6.43 | length 40.4
  Bottom Layer w0.152: U6.43@-7.247,17.608 -7.247,20.873 -7.242,20.878 -7.242,21.968 -6.559,22.651 9.607,22.651 10.287,21.971 ; U6.43@-7.247,17.833 -7.247,18.39 ; J6.1@9.898,21.171 10.287,21.971 ; J6.1@9.901,21.182 10.247,21.722 ; J6.1@9.916,21.229 10.327,21.722 ; J6.1@10.022,21.38 ccw(c9.496,21.971) 10.287,21.971 ; J6.1@10.043,21.114 10.247,21.722 ; J6.1@10.043,21.116 10.287,21.971 ; J6.1@10.049,21.144 10.327,21.722 ; J6.1@10.123,21.266 ccw(c9.798,21.631) 10.287,21.631 ccw(c10.776,21.631) J6.1@10.451,21.266 ; J6.1@10.193,21.083 10.247,21.722 ; J6.1@10.193,21.087 10.287,21.971 ; J6.1@10.194,21.095 10.327,21.722 ; J6.1@10.38,21.095 10.247,21.722 ; J6.1@10.381,21.083 10.327,21.722 ; J6.1@10.381,21.087 10.287,21.971 ; J6.1@10.525,21.144 10.247,21.722 ; J6.1@10.531,21.114 10.327,21.722 ; J6.1@10.531,21.116 10.287,21.971 ; J6.1@10.552,21.38 cw(c11.078,21.971) 10.287,21.971 ; J6.1@10.658,21.229 10.247,21.722 ; J6.1@10.673,21.182 10.327,21.722 ; J6.1@10.676,21.171 10.287,21.971 ; 10.247,21.722 J6.1@10.287,21.082 ; J6.1@10.287,21.082 10.327,21.722 ; J6.1@10.287,21.082 10.287,21.971
VCC-: C27.1 J4.4 Q7.1 Q8.1 Q8.8 R63.2 TP43.1 | length 84.5
  Top Layer w0.508: -55.68,2.981 v1(-55.68,5.08) ; J4.4@-47.315,14.521 -46.352,15.508 ; J4.4@-47.31,14.528 -45.715,16.261 ; J4.4@-47.217,14.61 ccw(c-47.425,14.946) -47.03,14.946 ; J4.4@-47.182,14.307 cw(c-46.006,14.307) -46.838,15.138 ; J4.4@-47.03,13.477 -47.03,14.946 ; J4.4@-46.843,14.61 cw(c-46.635,14.946) -47.03,14.946 ; J4.4@-46.721,14.131 -45.715,16.261 ; J4.4@-46.7,14.174 -46.352,15.508 ; J4.4@-46.674,14.307 cw(c-44.272,14.307) -45.971,16.005 ; -46.334,15.642 TP43.1@-44.831,17.272 -44.831,17.145 -47.03,14.946 ; -45.341,16.635 ccw(c-45.977,17.272) TP43.1@-45.077,17.272 ; J4.4@-47.03,14.307 -46.352,15.508 ; J4.4@-47.03,14.307 -47.03,14.946 ; J4.4@-47.03,14.307 -45.715,16.261 ; J4.4@-47.03,14.307 -47.03,14.946 ; -47.03,14.946 -46.688,14.406 -47.03,14.946 ; -47.03,14.946 -47.372,14.406 -47.03,14.946
  Top Layer w1: J4.4@-47.03,13.477 J4.4@-47.03,12.579 ; J4.4@-47.03,12.579 v3(-48.514,11.049) -47.03,12.647 -48.189,11.42 J4.4@-47.03,12.579
  Top Layer w1.5: v1(-57.023,2.667) -55.68,2.667 ; v3(-48.514,11.049) -50.175,9.434 ; -48.189,11.42 -50.175,9.434 ; -55.68,2.667 v1(-55.68,5.08) -55.68,2.667 ; -55.68,2.667 -52.299,2.667 -50.175,4.791 -50.175,9.434
  Bottom Layer w0.508: R63.2@-55.68,2.638 -55.68,2.045 ; v1(-55.68,5.08) -54.791,5.08 ; -55.233,1.854 cw(c-55.233,0.93) Q7.1@-54.579,1.584 ; -54.993,1.823 -54.435,1.727 -55.49,1.854 ; Q8.8@-54.496,5.375 Q8.8@-54.496,5.901 Q8.1@-54.496,11.651 ; Q8.8@-54.496,6.551 -54.496,8.25 ; -54.496,9.302 Q8.1@-54.496,11.001 ; Q7.1@-54.258,1.854 -55.49,1.854 ; -55.68,2.045 R63.2@-55.68,2.688 ; -55.68,2.045 -55.49,1.854 ; R63.2@-55.68,2.688 v1(-57.023,2.667) R63.2@-55.68,2.688 ; R63.2@-55.68,2.688 -57.069,2.688 R63.2@-55.68,2.688 ; -54.791,5.08 -54.496,5.251 -54.791,5.08 ; v3(-48.514,11.049) -48.514,10.202 v3(-48.514,11.049) ; v3(-48.514,11.049) C27.1@-48.514,10.152 v3(-48.514,11.049)
pads on no net: J2.13 J2.14 J7.13 J7.14 LS1.3 LS1.4 M1.4 M1.5 M2.4 M2.5 U1.4 U1.9 U1.11 U2.6 U6.2 U6.26

## Polygon pours and split planes (outlines as drawn)
PMID on Bottom Solder "Bottom Layer-No Net" (solid): -22.987,20.193 -21.082,20.193 -21.082,11.43 -23.114,11.43 -23.114,20.193
BAT on Top Solder "Bottom Layer-No Net" (solid): -70.358,22.733 -59.309,22.733 -58.166,21.59 -58.166,19.939 -70.358,19.939
ADAPTER on Top Solder "Bottom Layer-No Net" (solid): -26.035,14.224 -23.876,14.224 -23.876,12.446 -22.606,11.176 -21.336,9.906 -21.336,9.779 -19.05,9.779 -19.05,7.62 -22.352,7.62 -23.368,8.636 -26.162,11.43 -26.162,14.224
GND on Top Solder "Bottom Layer-No Net" (solid): -25.448,6.858 -20.701,6.858 -20.701,3.048 -17.907,3.048 -17.903,3.044 -17.903,1.78 -25.275,1.78 -25.4,1.905
AGND on Ground "Bottom Layer-No Net" (solid, remove dead copper, pour order 19): -0.254,14.224 6.604,14.224 6.604,2.032 5.969,1.397 4.572,0 -1.27,0 -1.27,3.429 0.127,3.429 0.127,14.224
GND on Ground "Bottom Layer-No Net" (solid, remove dead copper, pour order 22): -72.517,23.114 12.827,23.114 13.843,22.098 13.97,21.971 13.97,11.43 13.97,9.271 6.858,2.159 6.985,2.286 6.985,14.859 -0.381,14.859 -0.127,14.605 -0.127,3.683 -1.651,3.683 -1.651,0 -63.754,0 -65.405,0 -66.802,0 -76.327,9.525 -75.946,9.906 -75.946,19.304 -75.946,19.812 -72.517,23.241
AGND on Top Layer "Bottom Layer-No Net" (solid, pour order 17): -0.381,11.43 6.35,11.43 6.35,1.778 6.477,1.651 5.207,0.381 2.921,0.381 -0.127,0.381 -0.508,0
GND on Top Layer "Bottom Layer-No Net" (solid, remove dead copper, pour order 21): -41.656,7.62 -1.905,7.62 -1.778,7.493 -2.286,6.985 -2.286,0 -41.783,0
GND on Top Layer "Bottom Layer-No Net" (solid, remove dead copper, pour order 16): -19.177,21.717 -2.032,21.717 -2.032,11.049 -2.286,10.795 -20.701,10.795 -20.701,21.717
CHARGE_O on Power "Bottom Layer-No Net" (solid, remove dead copper, pour order 18): -50.8,21.082 -27.432,21.082 -27.432,20.955 -24.13,17.653 -24.638,17.145 -24.638,13.462 -39.624,13.462 -42.799,16.637 -44.069,17.907 -50.8,17.907
BATTERY on Power "Bottom Layer-No Net" (solid, remove dead copper, pour order 15): -75.946,19.431 -72.517,22.86 -62.611,22.86 -62.484,22.733 -62.484,18.796 -62.484,18.415 -65.659,15.24 -66.421,14.478 -66.421,11.049 -69.596,11.049 -69.596,13.335 -76.03,13.335
BAT on Power "Bottom Layer-No Net" (solid, pour order 20): -60.833,21.971 -51.054,21.971 -51.054,16.891 -50.8,17.145 -44.196,17.145 -44.196,16.383 -34.544,6.731 -34.29,6.985 -25.781,6.985 -24.765,6.985 -24.638,6.858 -24.638,2.921 -37.71,2.921 -37.778,2.853 -38.875,3.95 -59.585,3.95 -59.601,3.966 -59.436,4.131 -59.436,17.78 -60.706,17.78 -60.833,17.653
GND on Bottom Layer "Bottom Layer-No Net" (solid, remove dead copper, pour order 23): -2.286,4.699 -0.254,4.699 -0.254,1.905 -0.127,1.778 0,1.651 1.524,1.651 1.524,0.254 1.397,0.381 -2.286,0.381
GND on Bottom Layer "Bottom Layer-No Net" (solid, remove dead copper, pour order 24): -13.589,17.653 -12.319,17.653 -12.319,16.383 -12.192,16.256 -11.176,16.256 -11.176,15.607 -11.152,15.583 -11.24,15.494 -13.589,15.494

## Keep-outs
Keep-Out Layer:
  circle w0.127: c8.97,12 r1.1
  circle w0.127: c-71.03,12 r1.1
  lines w0.127: -70.545,3.515 ccw(c-62.06,12) -62.06,0 0,0 ccw(c0,12) 8.485,3.515 11.627,6.657 ccw(c5.97,12.313) 13.97,12.313 13.97,21 ccw(c11.97,21) 11.97,23 -20.512,23 ccw(c-20.521,22.491) -21.03,22.5 -21.03,21.5 cw(c-21.53,21.5) -21.53,21 -22.53,21 cw(c-22.53,21.5) -23.03,21.5 -23.03,22.5 ; -70.545,3.515 -73.687,6.657 cw(c-68.03,12.314) -76.03,12.314 -76.03,19.177 cw(c-75.313,19.177) -75.82,19.684 -72.765,22.739 cw(c-72.136,22.111) -72.136,23 -23.53,23 cw(c-23.539,22.491) -23.03,22.482

## Other copper
Ground:
  pour cut-out: -12.827,15.621 -10.033,15.621 -10.033,14.224 -12.827,14.224

## Silkscreen, mask and mechanical layers (free items; w line width, h text height)
Top Overlay:
  circle w0.102: c-41.935,19.304 r0.152
  lines w0.152: -42.183,19.638 -41.013,19.638 -41.013,20.838 -42.183,20.838 -42.183,19.638
  text "11AMBERMB10E-20160504-P5.1" at -16.383,20.32 h0.64
  text "ClearGrass" at -16.383,19.685 h0.64
  text "M5" at -13.081,19.685 h0.64
Bottom Overlay:
  drawing of 617 lines, arcs and shapes, not listed
  text "2#" at -13.451,17.793 h0.64

## Text inside footprints (layer, text, board x,y; h text height)
Us1: Bottom Overlay "GND" at -67.11,12.981 h0.64; Bottom Overlay "NTC" at -60.506,13.1 h0.64; Bottom Overlay "VCC" at -52.886,13.068 h0.64